# Altium PCB sw108-10.25.PcbDoc (part 1 of 2)
Units mm, origin at the board's own origin, x right, y up, seen from the top; angles counter-clockwise.
Board outline 60 x 92 mm, 2 copper layers (Top Layer, Bottom Layer); 64 components, 32 nets, 243 pads, 39 vias.
Unrouted connection lines stored in the file: 1.
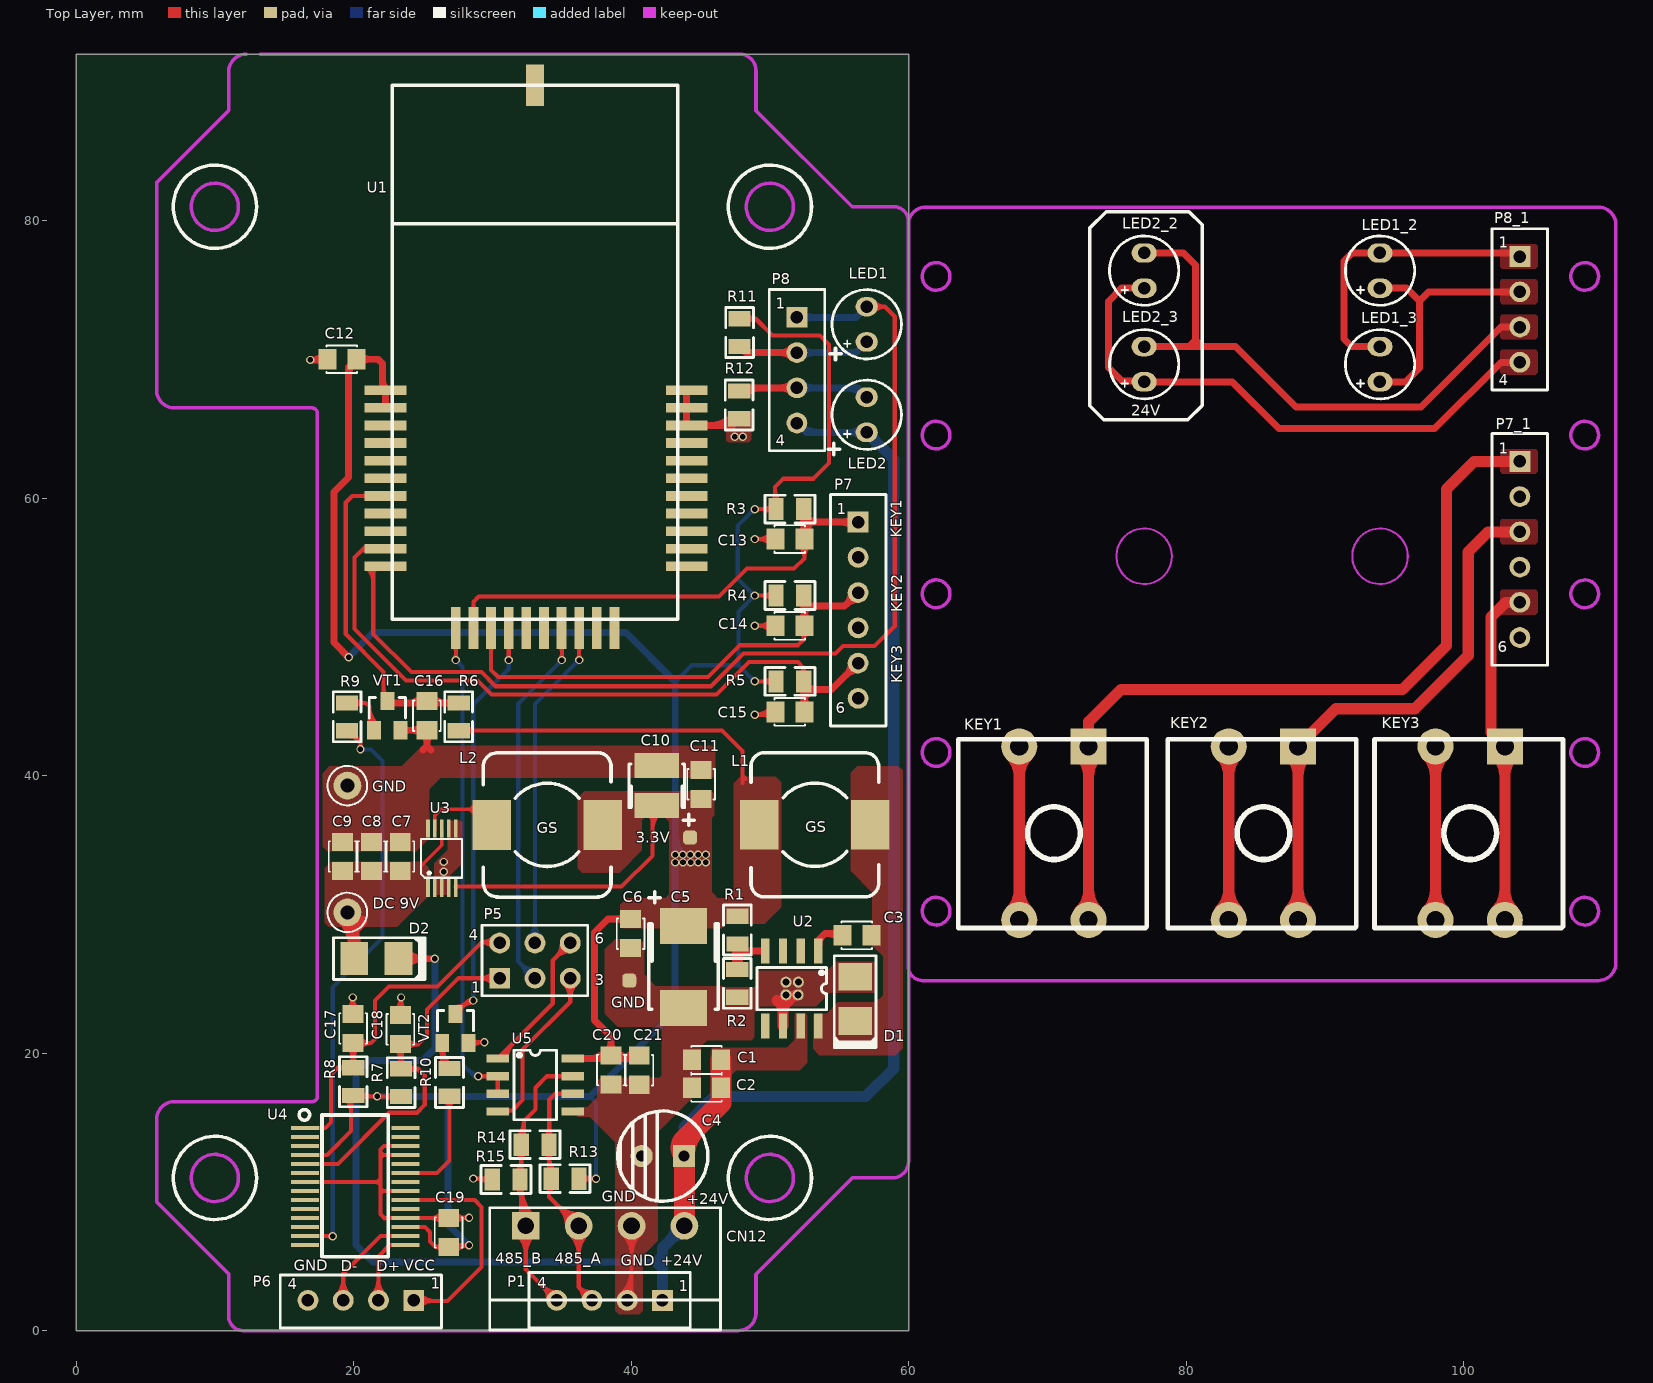
[diagram p0: Top Layer view]
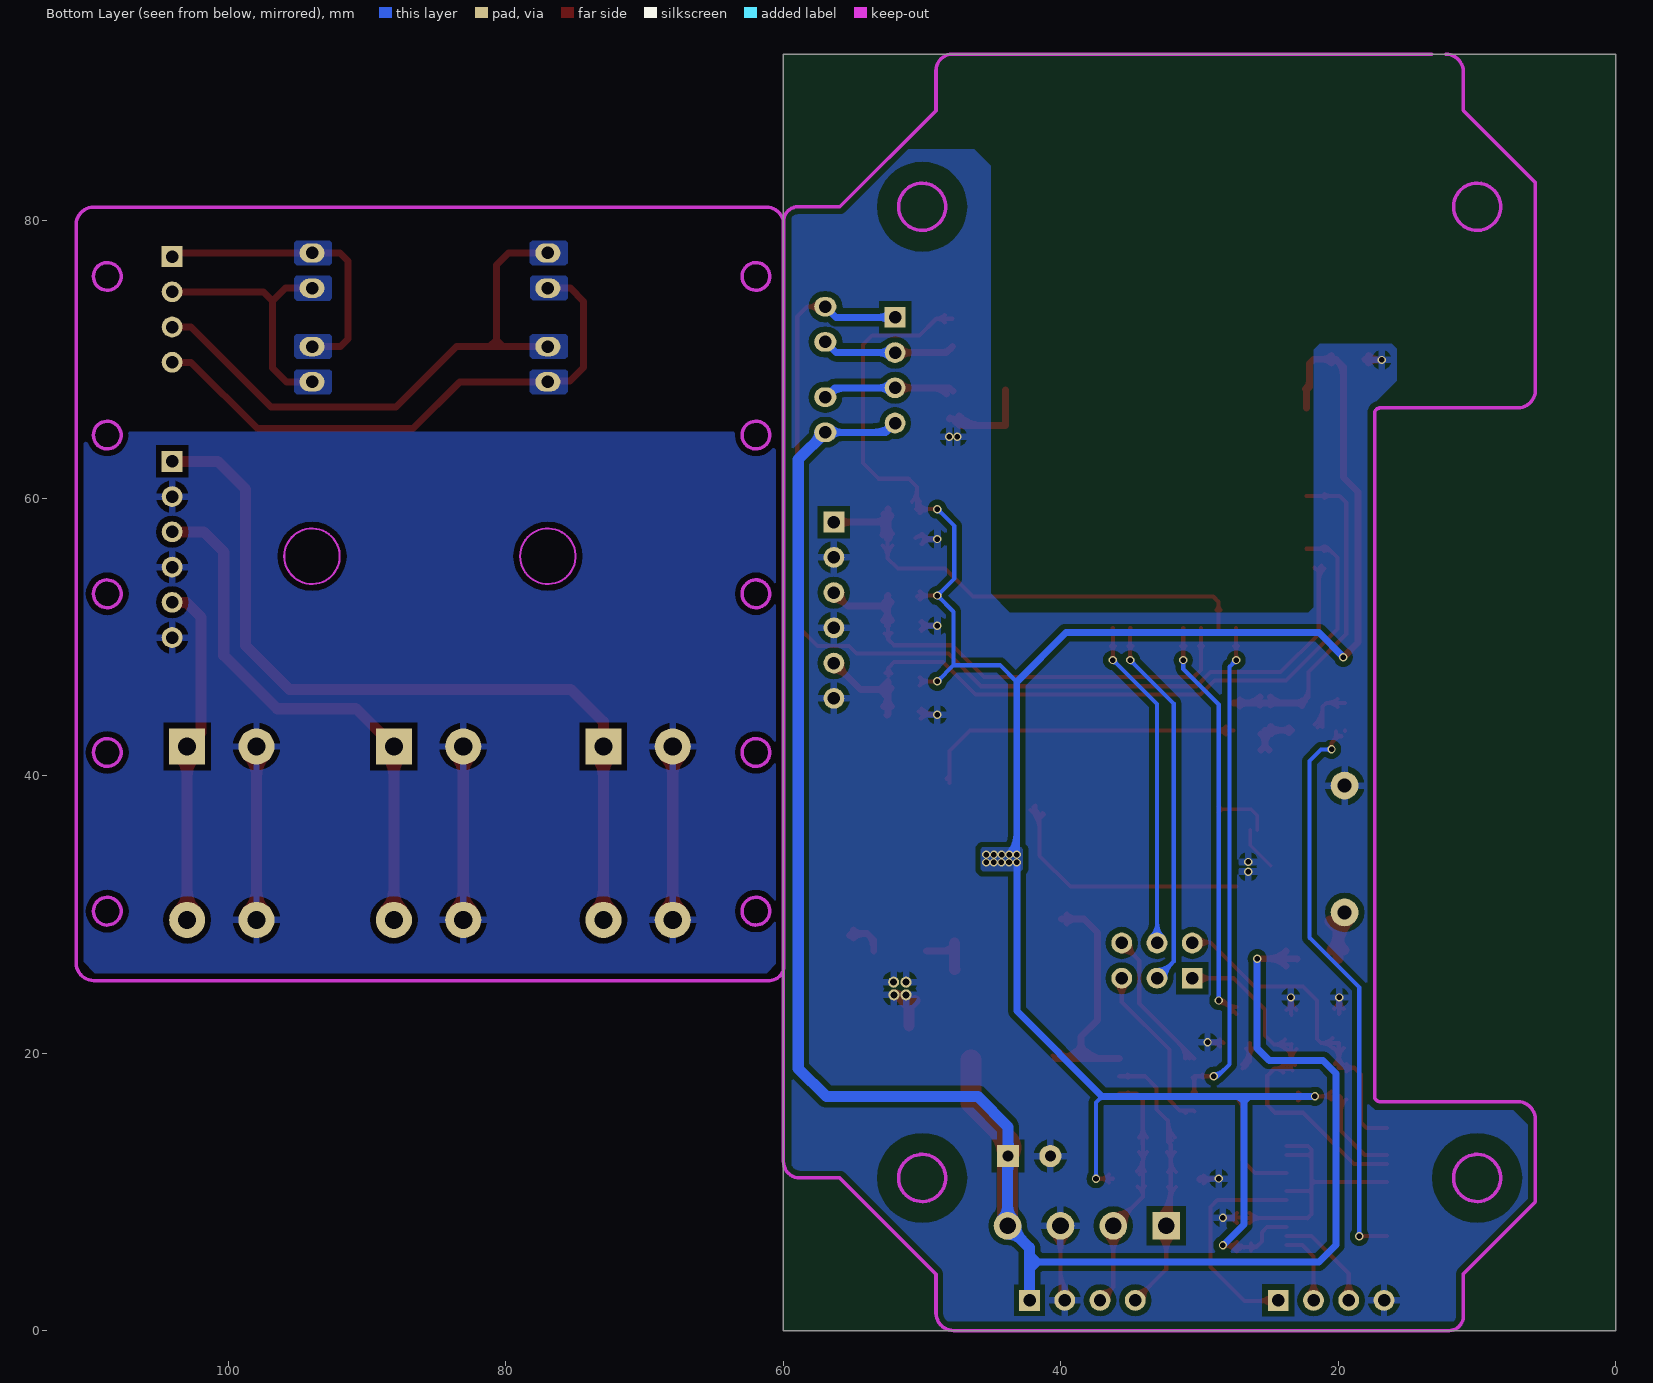
[diagram p1: Bottom Layer view, seen from below]

## Layer stack, top to bottom
Top Layer: signal copper 0.0356
Dielectric: dielectric 0.32, FR-4, Dk 4.8
Bottom Layer: signal copper 0.0356

## Board outline
0,0 60,0 60,92 0,92

## Design rules (kind name [scope] priority, off if disabled: settings)
Clearance [All] p1: gap=0.2
ComponentClearance [All] p1: gap=0.254 collisioncheckmode=3 verticalgap=0.254
PolygonConnect [All] p1: connectstyle=Direct reliefconductorwidth=0.5 reliefentries=4 polygonreliefangle="90 Angle"
RoutingVias [All] p1: holewidth=0.711 width=1.27 viastyle="Through Hole" minholewidth=0.711 minwidth=1.27 maxholewidth=0.711 maxwidth=1.27
SolderMaskExpansion [All] p1: expansion=0.102
TestPointUsage [All] p1: valid=0 allowmultiple=FALSE
Testpoint [All] p1: side=15 testpointundercomponent=TRUE minsize=1.016 maxsize=2.54 preferedsize=1.524 minholesize=0 maxholesize=1.016 preferedholesize=0.813 testpointgrid=0.025 style=1023 order=0123456789
Width [All] p1: maxlimit=2 minlimit=0.254 preferedwidth=0.254 toplayer_prefwidth=0.3 bottomlayer_prefwidth=0.3 minimp=50.000000 maximp=50.000000 favimp=50.000000
18 further rules are at their usual default settings.

## Classes and differential pairs
component class SW108_0713: C1 C2 C3 C4 C5 C6 C7 C8 C9 C10 C11 C12 C13 C14 C15 C16 C17 C18 C19 C20 C21 D1 D2 KEY1 KEY2 KEY3 L1 L2 LED1 LED2 P1 P5 P6 R1 R2 R3 R4 R5 R6 R7 R8 R9 R10 R11 R12 R13 R14 R15 U1 U2 U3 U4 U5 VT1 VT2

## Components (designator, comment, footprint, x,y, rotation, side; value= is the part's Value field where it differs from the comment)
C1 "4.7μF/10%/0805" C-0805 43.73,18.62 r0 top
C2 "4.7μF/10%/0805" C-0805 43.73,16.6 r0 top
C3 "0.01μF/10%/0805" C-0805 54.57,27.59 r0 top
C4 "220μF" CZ3.0/6.5 42.28,12.58 r0 top
C5 "476C" C-TAN-D 41.28,30.46 r270 top
C6 "0.1μf/10%/0805" C-0805 40.86,26.91 r90 top
C7 "4.7μF/10%/0805" C-0805 22.462,35.876 r270 top
C8 "4.7μF/10%/0805" C-0805 20.382,35.876 r270 top
C9 "4.7μF/10%/0805" C-0805 18.302,35.876 r270 top
C10 "47uF/20%/10V/B" C-TAN-B 43.85,36.94 r90 top
C11 "0.1μf/10%/0805" C-0805 44.14,41.07 r270 top
C12 "0.1uf/10%/0805" C-0805 17.45,69.11 r0 top
C13 "0.1uf/10%/0805" C-0805 49.74,56.15 r0 top
C14 "0.1uf/10%/0805" C-0805 49.74,49.9 r0 top
C15 "0.1uf/10%/0805" C-0805 49.74,43.69 r0 top
C16 "0.1uf/10%/0805" C-0805 26.18,42.62 r90 top
C17 "100pf/10%/0805" C-0805 19.06,23.48 r270 top
C18 "100pf/10%/0805" C-0805 22.47,23.41 r270 top
C19 "0.1μf/10%/0805" C-0805 25.95,8.77 r270 top
C20 "0.1uf/10%/0805" C-0805 39.45,17.09 r90 top
C21 "1uf/10%/0805" C-0805 41.49,17.07 r90 top
CN12 "模拟指令" MC1.5/4-G-3.81 32.41,7.55 r0 top locked
D1 "1N5408/SMA" "SMA 2+" 54.59,27.05 r270 top
D2 "1N5408/SMB" "SMA 2+" 18.5,25.26 r0 top
KEY1 "Header 2" TSQG-3 70.46,35.852 r90 top locked
KEY2 "Header 2" TSQG-3 85.56,35.852 r90 top locked
KEY3 "Header 2" TSQG-3 100.46,35.852 r90 top locked
L1 "15μH" GSDS104C2 53.24,36.46 r270 top
L2 "15μH" GSDS104C2 33.95,36.45 r90 top
LED1 "green LED" LED-φ3#1 56.98,72.53 r90 top
LED1_2 "green LED" LED-φ3#2 93.974,76.4 r90 top locked (schematic designator LED1)
LED1_3 "green LED" LED-φ3#2 93.974,69.65 r90 top locked (schematic designator LED1)
LED2 "VDD33" LED-φ3#1 56.98,66.01 r90 top
LED2_2 "VDD33" LED-φ3#2 76.974,76.4 r90 top locked (schematic designator LED2)
LED2_3 "VDD33" LED-φ3#2 76.974,69.65 r90 top locked (schematic designator LED2)
P1 "1*4/2.54排针" PIN-S-2.54-1*4 42.26,2.18 r180 top locked
P5 "2*3排针" HDR2X3_CEN 30.53,25.4 r0 top
P6 "1*4/2.54排针" PIN-S-2.54-1*4 24.33,2.18 r180 top locked
P7 "1*4/2.54排针" PIN-S-2.54-1*6 56.36,58.27 r270 top (schematic designator P6)
P7_1 "1*4/2.54排针" PIN-S-2.54-1*6 104.054,62.65 r270 top locked (schematic designator P6)
P8 "1*4/2.54排针" PIN-S-2.54-1*4 51.95,73.03 r270 top (schematic designator P6)
P8_1 "1*4/2.54排针" PIN-S-2.54-1*4 104.054,77.41 r270 top locked (schematic designator P6)
R1 "10K" R-0805 48.56,27.37 r90 top
R2 "7580M\3.24K" R-0805 46.75,26.53 r270 top
R3 "10K/5%/0805" R-0805 52.95,60.11 r180 top
R4 "10K/5%/0805" R-0805 52.95,53.88 r180 top
R5 "10K/5%/0805" R-0805 52.95,47.69 r180 top
R6 "10K/5%/0805" R-0805 26.67,45.74 r270 top
R7 "3.3K/5%/0805" R-0805 22.52,19.37 r270 top
R8 "3.3K/5%/0805" R-0805 19.07,19.44 r270 top
R9 "1K/5%/0805" R-0805 18.63,45.74 r270 top
R10 "1K/5%/0805" R-0805 26.01,19.39 r270 top
R11 "3.3K/5%/0805" R-0805 46.92,73.43 r270 top
R12 "1.5K/5%/0805" R-0805 48.69,65.22 r90 top
R13 "3.3K/5%/0805" R-0805 33.74,10.05 r0 top
R14 "120ohm" R-0805 31.58,12.5 r0 top
R15 "3.3K/5%/0805" R-0805 29.49,9.99 r0 top
U1 "STM32W_1" STM32W108-3 43.37,51.27 r90 top locked
U2 "TPS5430" SO-G8#1 51.57,24.65 r180 top
U3 "TPS62056" MSOP-10 25.352,32.006 r0 top
U4 "FT232R" SSOP-28 16.5,14.61 r0 top
U5 "MAX3485CSA" SO-G8#2 33.09,17.69 r270 top
VT1 "2N3904" SOT23-3 21.48,43.27 r0 top
VT2 "2N3904" SOT23-3 26.39,20.73 r0 top

## Footprints (in the part's own frame and the unit in brackets; to place one, negate y for a bottom-side part, rotate by r counter-clockwise, add the part's x,y. Pads: shape width x height; smd on the part's side, far side on the other; paste and mask are expansions set on the pad)
C-0805 [mm]
  rect 1.3x1.5 smd: 1(0.65,0.9) 2(2.75,0.9)
  silkscreen extent 0.6,-0.1 2.8,1.9
C-TAN-B [mm]
  rect 1.8x3.2 smd: 1(0.9,2) 2(3.8,2)
  silkscreen extent 0.75,0 3.9,4
C-TAN-D [mm]
  rect 2.6x3.4 smd: 1(1.3,2.5) 2(7.2,2.5)
  silkscreen extent 1.15,0 7.3,5
CZ3.0/6.5 [mm]
  rect 1.6x1.6 hole 0.8: 1(1.524,0)
  round 1.6 hole 0.8: 2(-1.524,0)
  silkscreen extent -3.25,-3.25 3.25,3.25
GSDS104C2 [mm]
  rect 3.6x2.8 smd: 1(0,4) 2(0,-4)
  silkscreen extent -5.2,-4.6 5.21,4.6
HDR2X3_CEN [mm] "Connector; Header; 3x2 Position"
  rect 1.5x1.5 hole 0.9: 1(0,0)
  round 1.5 hole 0.9: 2(2.54,0) 3(5.08,0) 4(0,2.54) 5(2.54,2.54) 6(5.08,2.54)
  silkscreen extent -1.27,-1.27 6.35,3.81
LED-φ3#1 [mm]
  oval 1.4x1.6 hole 0.9: 1(-1.27,0) 2(1.27,0)
  silkscreen extent -2.5,-2.5 2.5,2.5
LED-φ3#2 [mm]
  oval 1.4x1.8 hole 0.9: 1(-1.27,0) 2(1.27,0)
  silkscreen extent -2.5,-2.5 2.5,2.5
MC1.5/4-G-3.81 [mm]
  rect 2x2 hole 1.2: 1(0,0)
  round 2 hole 1.2: 2(3.81,0) 3(7.62,0) 4(11.43,0)
  silkscreen extent -2.6,-7.5 14.03,1.3
MSOP-10 [mm]
  rect 0.27x1.3 smd mask+0.05: 1(0,-0.1) 2(0.5,-0.1) 3(1,-0.1) 4(1.5,-0.1) 5(2,-0.1) 6(2,4.175) 7(1.5,4.175) 8(1,4.175) 9(0.5,4.175) 10(0,4.175)
  silkscreen extent -0.51,0.64 2.46,3.43
PIN-S-2.54-1*4 [mm]
  rect 1.5x1.5 hole 0.9: 1(0,0)
  round 1.5 hole 0.9: 2(2.54,0) 3(5.08,0) 4(7.62,0)
  silkscreen extent -2,-2 9.62,2
PIN-S-2.54-1*6 [mm]
  rect 1.5x1.5 hole 0.9: 1(0,0)
  round 1.5 hole 0.9: 2(2.54,0) 3(5.08,0) 4(7.62,0) 5(10.16,0) 6(12.7,0)
  silkscreen extent -2,-2 14.7,2
R-0805 [mm]
  rect 1.1x1.6 smd: 1(0.5,0.9) 2(2.5,0.9)
  silkscreen extent -0.3,-0.1 3.3,1.9
"SMA 2+" [mm]
  rect 2x2.4 smd: 1(1.538,1.554) 2(4.738,1.554)
  silkscreen extent 0.04,0.05 6.64,3.05
SO-G8#1 [mm]
  rect 0.6x1.8 smd: 1(-1.916,-2.7) 2(-0.646,-2.7) 3(0.624,-2.7) 4(1.894,-2.7) 5(1.894,2.7) 6(0.624,2.7) 7(-0.646,2.7) 8(-1.916,2.7)
  silkscreen extent -2.51,-1.52 2.49,1.52
SO-G8#2 [mm]
  rect 0.6x1.6 smd: 1(-1.916,-2.7) 2(-0.646,-2.7) 3(0.624,-2.7) 4(1.894,-2.7) 5(1.894,2.7) 6(0.624,2.7) 7(-0.646,2.7) 8(-1.916,2.7)
  silkscreen extent -2.51,-1.52 2.49,1.52
SOT23-3 [mm]
  rect 1x1.3 smd: 1(0,0) 2(1.9,0) 3(0.95,2.1)
  silkscreen extent -0.35,0.87 2.25,2.35
SSOP-28 [mm]
  rect 2x0.3 smd: 1(0,0) 2(0,-0.65) 3(0,-1.3) 4(0,-1.95) 5(0,-2.6) 6(0,-3.25) 7(0,-3.9) 8(0,-4.55) 9(0,-5.2) 10(0,-5.85) 11(0,-6.5) 12(0,-7.15) 13(0,-7.8) 14(0,-8.45) 15(7.239,-8.45) 16(7.239,-7.8) 17(7.239,-7.15) 18(7.239,-6.5) 19(7.239,-5.85) 20(7.239,-5.2) 21(7.239,-4.55) 22(7.239,-3.9) 23(7.239,-3.25) 24(7.239,-2.6) 25(7.239,-1.95) 26(7.239,-1.3) 27(7.239,-0.65) 28(7.239,0)
  silkscreen extent -0.43,-9.27 5.99,1.32
STM32W108-3 [mm]
  rect 0.7x3 smd: 1(16.51,21.074) 2(15.24,21.074) 3(13.97,21.074) 4(12.7,21.074) 5(11.43,21.074) 6(10.16,21.074) 7(8.89,21.074) 8(7.62,21.074) 9(6.35,21.074) 10(5.08,21.074) 11(3.81,21.074) 22(3.81,-0.627) 23(5.08,-0.627) 24(6.35,-0.627) 25(7.62,-0.627) 26(8.89,-0.627) 27(10.16,-0.627) 28(11.43,-0.627) 29(12.7,-0.627) 30(13.97,-0.627) 31(15.24,-0.627) 32(16.51,-0.627)
  rect 3x0.7 smd: 12(-0.627,16.002) 13(-0.627,14.732) 14(-0.627,13.462) 15(-0.627,12.192) 16(-0.627,10.922) 17(-0.627,9.652) 18(-0.627,8.382) 19(-0.627,7.112) 20(-0.627,5.842) 21(-0.627,4.572)
  rect 3x1.3 smd: ""(38.5,10.314)
  silkscreen extent 0,0 38.5,20.57
TSQG-3 [mm]
  rect 2.6x2.6 hole 1.3: 1(6.248,-2.515)
  round 2.6 hole 1.3: 2(6.248,2.485) 3(-6.252,-2.515) 4(-6.252,2.485)
  silkscreen extent -6.83,-6.71 6.76,6.88

## Part data
C1 C2 C3 C6 C7 C8 C9 C11 C12 C13 C14 C15 C16 C17 C18 C19 C20 C21: library part Cap, "Capacitor"
C4 C5: library part "Cap Pol1", "Polarized Capacitor (Radial)"
C10: library part ASC-0013BA
CN12: library part Header1*4
D1 D2: library part "Diode 1N5408", "3 Amp Medium Power Silicon Rectifier Diode"
KEY1 KEY2 KEY3: "Header, 2-Pin"
L1 L2: library part Inductor, "Inductor"
LED1 LED1_2 LED1_3: library part LED
LED2 LED2_2 LED2_3: library part LED3, "Typical BLUE SiC LED"
P1 P6 P7 P7_1 P8 P8_1: library part "Header 4", "Header, 4-Pin"
P5: library part "Header 3X2A", "Header, 3-Pin, Dual row"
R1 R2 R3 R4 R5 R6 R12: library part Res2, "Resistor"
R7 R8: library part RES_1
R9 R10 R11 R13 R14 R15: library part RES, "R"
U1: library part STM32W108-3
U5: library part MAX485CSA, "Low-Power, Slew-Rate-Limited RS-485/RS-422 Transceiver"
VT1 VT2: library part NPN, "NPN Transistor"

## Free pads (board coordinates)
  round 2 hole 1: 0(19.55,30.14) 1(19.55,39.28)
  round 0.8 hole 0.5: 0(51.16,25.11) 1(52.05,25.11) 2(51.16,24.2) 3(52.03,24.2)
  rrect50% 1x1 smd: 4(44.25,35.54) 5(39.87,25.23)

## Via types
v1: diameter 0.6, hole 0.4, Top Layer to Bottom Layer, 39 vias

## Nets (pads, with @x,y where several pads share a name; then routed paths per layer and width w, separated by ;. In a path a pad name is that pad's centre, name@x,y a point inside that pad or via, vN(x,y) a via of type N, cw(c..) or ccw(c..) an arc to the next point about the centre after c; other vN are vias at no path point)
485_A: CN12.2 P1.3 R13.1 R14.2 U5.6 | length 57.1
  Top Layer w0.3: U5.6@35.79,17.066 34.526,17.066 34.1,16.64 34.1,13.42 R14.2@34.08,13.4 34.08,9.65 CN12.2@36.36,7.37 ; CN12.2@36.22,7.55 36.22,3.14 ; P1.3@37.18,2.18 36.22,3.14 ; 34.08,12.184 cw(c35.046,12.184) 34.363,12.867 ccw(c35.046,12.184) 34.08,12.184 ; 34.08,12.184 ccw(c33.114,12.184) 33.797,12.867 cw(c33.114,12.184) 34.08,12.184 ; 34.928,17.066 cw(c34.928,16.704) 35.184,16.96 ccw(c34.928,16.704) 34.928,17.066 ; 34.928,17.066 ccw(c34.928,17.428) 35.184,17.172 cw(c34.928,17.428) 34.928,17.066 ; 36.22,3.14 cw(c35.346,2.266) 36.581,2.208 ccw(c35.346,2.266) 36.22,3.14 ; 36.22,3.14 ccw(c37.094,4.014) 37.152,2.779 cw(c37.094,4.014) 36.22,3.14 ; 36.22,5.498 cw(c38.272,5.498) 36.821,6.949 ccw(c38.272,5.498) 36.22,5.498 ; 36.22,5.498 ccw(c34.168,5.498) 35.619,6.949 cw(c34.168,5.498) 36.22,5.498 ; 36.22,6.222 cw(c37.548,6.222) 36.609,7.161 ccw(c37.548,6.222) 36.22,6.222 ; 36.22,6.222 ccw(c34.892,6.222) 35.831,7.161 cw(c34.892,6.222) 36.22,6.222 ; R14.2@33.797,13.933 ccw(c33.066,14.664) 34.1,14.664 cw(c33.066,14.664) R14.2@33.797,13.933 ; R13.1@33.957,10.417 cw(c33.661,10.121) 34.08,10.121 ccw(c33.661,10.121) R13.1@33.957,10.417 ; R13.1@33.957,11.483 ccw(c33.661,11.779) 34.08,11.779 cw(c33.661,11.779) R13.1@33.957,11.483 ; 34.08,9.638 cw(c34.967,9.638) 34.466,10.37 ccw(c34.967,9.638) 34.08,9.638 ; 34.08,11.828 ccw(c34.868,11.828) 34.311,11.271 cw(c34.868,11.828) 34.08,11.828 ; 34.08,12.552 ccw(c35.592,12.552) 34.523,11.483 cw(c35.592,12.552) 34.08,12.552 ; 34.1,14.567 ccw(c34.997,14.567) 34.363,13.933 cw(c34.997,14.567) 34.1,14.567 ; 34.701,9.029 ccw(c36.22,10.549) 36.22,8.4 cw(c36.22,10.549) 34.701,9.029 ; 34.797,8.933 cw(c33.414,7.55) 35.37,7.55 ccw(c33.414,7.55) 34.797,8.933 ; 35.213,8.517 ccw(c36.22,9.524) 36.22,8.1 cw(c36.22,9.524) 35.213,8.517 ; 35.309,8.421 cw(c34.439,7.55) 35.67,7.55 ccw(c34.439,7.55) 35.309,8.421
485_B: CN12.1 P1.4 R14.1 R15.2 U5.7 | length 62.3
  Top Layer w0.3: P1.4@34.64,2.18 32.41,4.41 CN12.1@32.41,7.55 32.08,7.88 R14.1@32.08,13.4 32.28,13.6 32.28,15.12 33.11,15.95 33.11,17.5 33.946,18.336 U5.7@35.79,18.336 ; 32.08,12.184 cw(c33.046,12.184) 32.363,12.867 ccw(c33.046,12.184) 32.08,12.184 ; 32.08,12.184 ccw(c31.114,12.184) 31.797,12.867 cw(c31.114,12.184) 32.08,12.184 ; 32.41,5.498 cw(c34.462,5.498) 33.011,6.949 ccw(c34.462,5.498) 32.41,5.498 ; 32.41,5.498 ccw(c30.358,5.498) 31.809,6.949 cw(c30.358,5.498) 32.41,5.498 ; 32.41,6.222 cw(c33.738,6.222) 32.799,7.161 ccw(c33.738,6.222) 32.41,6.222 ; 32.41,6.222 ccw(c31.082,6.222) 32.021,7.161 cw(c31.082,6.222) 32.41,6.222 ; 33.616,3.204 cw(c32.591,2.18) 34.04,2.18 ccw(c32.591,2.18) 33.616,3.204 ; 33.616,3.204 ccw(c34.64,4.229) 34.64,2.78 cw(c34.64,4.229) 33.616,3.204 ; 34.928,18.336 cw(c34.928,17.974) 35.184,18.23 ccw(c34.928,17.974) 34.928,18.336 ; 34.928,18.336 ccw(c34.928,18.698) 35.184,18.442 cw(c34.928,18.698) 34.928,18.336 ; R15.2@31.707,10.357 cw(c30.807,9.457) 32.08,9.457 ccw(c30.807,9.457) R15.2@31.707,10.357 ; R15.2@31.707,11.423 ccw(c30.807,12.323) 32.08,12.323 cw(c30.807,12.323) R15.2@31.707,11.423 ; R14.1@31.797,13.933 ccw(c30.631,15.099) 32.28,15.099 cw(c30.631,15.099) R14.1@31.797,13.933 ; CN12.1@31.809,8.151 ccw(c31.155,8.805) 32.08,8.805 cw(c31.155,8.805) CN12.1@31.809,8.151 ; R14.1@32.009,13.721 ccw(c31.356,14.374) 32.28,14.374 cw(c31.356,14.374) R14.1@32.009,13.721 ; 32.08,8.95 ccw(c33.81,8.95) 32.587,7.727 cw(c33.81,8.95) 32.08,8.95 ; 32.08,9.675 ccw(c34.535,9.675) 32.799,7.939 cw(c34.535,9.675) 32.08,9.675 ; 32.08,9.892 cw(c32.738,9.892) 32.273,10.357 ccw(c32.738,9.892) 32.08,9.892 ; R15.2@32.08,10.399 ccw(c35.259,10.399) 33.011,8.151 cw(c35.259,10.399) R15.2@32.08,10.399 ; 32.08,11.888 ccw(c32.738,11.888) 32.273,11.423 cw(c32.738,11.888) 32.08,11.888
/RESET: C16.2 R6.1 U1.7 VT1.3 | length 37.2
  Top Layer w0.3: U1.7@22.296,60.16 19.9,60.16 19.43,59.69 19.43,50.21 22.16,47.48 22.16,45.64 VT1.3@22.43,45.37 ; 20.663,60.16 cw(c20.663,59.677) 21.005,60.019 ccw(c20.663,59.677) 20.663,60.16 ; 20.663,60.16 ccw(c20.663,60.643) 21.005,60.301 cw(c20.663,60.643) 20.663,60.16 ; 22.16,46.292 ccw(c23.203,46.292) 22.465,45.555 cw(c23.203,46.292) 22.16,46.292
  Top Layer w0.5: VT1.3@22.43,45.37 22.56,45.24 R6.1@27.57,45.24 ; 26.596,45.24 cw(c26.596,44.516) 27.108,45.028 ccw(c26.596,44.516) 26.596,45.24 ; 26.596,45.24 ccw(c26.596,45.964) 27.108,45.452 cw(c26.596,45.964) 26.596,45.24 ; VT1.3@22.607,45.043 cw(c23.082,44.568) 23.082,45.24 ccw(c23.082,44.568) VT1.3@22.607,45.043 ; VT1.3@22.607,45.397 ccw(c22.985,45.775) 22.985,45.24 cw(c22.985,45.775) VT1.3@22.607,45.397 ; 23.901,45.24 ccw(c23.901,46.649) 24.897,45.653 cw(c23.901,46.649) 23.901,45.24 ; 24.528,45.24 cw(c24.528,44.718) 24.897,45.087 ccw(c24.528,44.718) 24.528,45.24 ; C16.2@25.663,45.087 cw(c26.032,44.718) 26.032,45.24 ccw(c26.032,44.718) C16.2@25.663,45.087 ; C16.2@25.663,45.653 ccw(c26.659,46.649) 26.659,45.24 cw(c26.659,46.649) C16.2@25.663,45.653
BOOT: U1.15 VT2.3 | length 39.5
  Top Layer w0.3: VT2.3@27.34,22.83 28.3,23.79 ; v1(28.61,23.79) 28.3,23.79 ; U1.15@31.178,50.643 31.18,50.641 v1(31.18,48.33) ; 28.3,23.79 cw(c28.3,23.545) 28.492,23.697 ccw(c28.3,23.545) 28.3,23.79 ; 28.3,23.79 ccw(c28.3,24.035) 28.492,23.883 cw(c28.3,24.035) 28.3,23.79 ; 31.18,48.692 cw(c30.818,48.692) 31.074,48.436 ccw(c30.818,48.692) 31.18,48.692 ; 31.18,48.692 ccw(c31.542,48.692) 31.286,48.436 cw(c31.542,48.692) 31.18,48.692 ; VT2.3@27.34,23.33 ccw(c27.34,24.537) 28.194,23.684 cw(c27.34,24.537) VT2.3@27.34,23.33 ; VT2.3@27.69,22.98 cw(c28.173,22.98) 27.831,23.321 ccw(c28.173,22.98) VT2.3@27.69,22.98 ; VT2.3@27.825,23.315 cw(c28.61,22.529) 28.61,23.64 ccw(c28.61,22.529) VT2.3@27.825,23.315 ; 28.145,23.635 cw(c28.354,23.426) 28.524,23.667 ccw(c28.354,23.426) 28.145,23.635 ; U1.15@31.037,49.352 cw(c30.69,49.005) 31.18,49.005 ccw(c30.69,49.005) U1.15@31.037,49.352 ; 31.18,49.015 cw(c31.656,49.015) 31.319,49.352 ccw(c31.656,49.015) 31.18,49.015
  Bottom Layer w0.3: v1(28.61,23.79) 28.62,23.8 28.62,45.13 31.18,47.69 v1(31.18,48.33) ; 31.18,47.968 cw(c31.542,47.968) 31.286,48.224 ccw(c31.542,47.968) 31.18,47.968 ; 31.18,47.968 ccw(c30.818,47.968) 31.074,48.224 cw(c30.818,47.968) 31.18,47.968
CBUS0: R10.2 U4.23 | length 11.2
  Top Layer w0.3: U4.23@23.739,11.36 26.01,11.36 26.91,12.26 R10.2@26.91,16.89 ; 26.91,15.924 cw(c27.876,15.924) 27.193,16.607 ccw(c27.876,15.924) 26.91,15.924 ; 26.91,15.924 ccw(c25.944,15.924) 26.627,16.607 cw(c25.944,15.924) 26.91,15.924
CBUS2: R9.2 U4.13 | length 47.9
  Top Layer w0.3: U4.13@16.5,6.81 18.48,6.81 v1(18.49,6.8) ; R9.2@19.51,43.22 R9.2@19.53,43.24 ; R9.2@19.96,42.89 20.49,42.36 v1(20.49,41.89) ; 20.49,42.252 cw(c20.128,42.252) 20.384,41.996 ccw(c20.128,42.252) 20.49,42.252 ; 20.49,42.252 ccw(c20.852,42.252) 20.596,41.996 cw(c20.852,42.252) 20.49,42.252 ; 18.104,6.81 cw(c18.104,6.414) 18.384,6.694 ccw(c18.104,6.414) 18.104,6.81 ; 18.152,6.81 ccw(c18.152,7.138) 18.384,6.906 cw(c18.152,7.138) 18.152,6.81 ; R9.2@19.78,42.84 cw(c19.78,42.285) 20.173,42.677 ccw(c19.78,42.285) R9.2@19.78,42.84 ; R9.2@20.174,43.172 ccw(c20.991,43.031) 20.405,42.445 cw(c20.991,43.031) R9.2@20.174,43.172
  Bottom Layer w0.3: v1(18.49,6.8) 18.49,24.73 22.08,28.32 22.08,41.05 21.24,41.89 v1(20.49,41.89) ; 18.49,7.162 cw(c18.128,7.162) 18.384,6.906 ccw(c18.128,7.162) 18.49,7.162 ; 18.49,7.162 ccw(c18.852,7.162) 18.596,6.906 cw(c18.852,7.162) 18.49,7.162 ; 20.852,41.89 cw(c20.852,42.252) 20.596,41.996 ccw(c20.852,42.252) 20.852,41.89 ; 20.852,41.89 ccw(c20.852,41.528) 20.596,41.784 cw(c20.852,41.528) 20.852,41.89
D+: P6.2 U4.15 | length 10
  Top Layer w0.3: P6.2@21.79,2.18 21.79,5.35 22.6,6.16 U4.15@23.739,6.16 ; 21.79,3.629 cw(c20.341,3.629) 21.366,2.604 ccw(c20.341,3.629) 21.79,3.629 ; 21.79,3.629 ccw(c23.239,3.629) 22.214,2.604 cw(c23.239,3.629) 21.79,3.629
D-: P6.3 U4.16 | length 12.1
  Top Layer w0.3: P6.3@19.25,2.18 19.25,4.11 21.95,6.81 U4.16@23.739,6.81 ; 19.25,3.629 cw(c17.801,3.629) 18.826,2.604 ccw(c17.801,3.629) 19.25,3.629 ; 19.25,3.629 ccw(c20.699,3.629) 19.674,2.604 cw(c20.699,3.629) 19.25,3.629
GND: C1.1 C2.1 C4.2 C5.2 C6.1 C7.1 C8.1 C9.1 C10.2 C11.1 C12.1 C13.1 C14.1 C15.1 C16.1 C17.1 C18.1 C19.1 C20.1 C21.1 CN12.3 D1.1 KEY1.2 KEY1.4 KEY2.2 KEY2.4 KEY3.2 KEY3.4 P1.2 P6.4 P7.2 P7.4 P7.6 P7_1.2 P7_1.4 P7_1.6 pad.0@51.16,25.11 pad.1 pad.2 pad.3 pad.5 R2.2 R12.1 R15.1 U1.30 U1.31 U1.32 U2.6 U3.2 U3.3 U3.4 U3.6 U3.7 U3.10 U4.7 U4.18 U4.21 U4.25 U4.26 U5.5 VT1.2 VT2.2 | length 215.1
  Top Layer w0.3: U4.7@16.5,10.71 21.7,10.71 ; v1(19.94,24.01) 19.94,22.85 C17.1@19.96,22.83 ; 21.93,9.87 22.12,10.06 ; 21.93,10.25 22.12,10.06 ; 21.93,10.48 21.7,10.71 ; 21.93,10.94 21.7,10.71 ; 21.93,12.75 22.02,12.66 ; 21.97,12.49 22.14,12.66 ; 21.97,12.83 22.14,12.66 ; C18.1@23.37,22.76 23.42,22.81 v1(23.42,24.01) ; U4.21@23.739,10.06 22.12,10.06 ; U4.25@23.739,12.66 22.14,12.66 ; U4.26@23.739,13.31 22.18,13.31 21.93,13.06 21.93,8.39 22.22,8.1 22.23,8.11 C19.1@26.85,8.11 ; C19.1@26.85,8.12 26.87,8.14 v1(28.32,8.14) ; VT2.2@28.29,20.73 28.35,20.79 v1(29.43,20.79) ; v1(28.61,10.96) R15.1@29.92,10.96 ; CN12.3@40.03,7.55 40.03,2.49 P1.2@39.72,2.18 ; v1(48.9,44.38) C15.1@49.85,44.38 ; v1(48.9,50.8) C14.1@49.85,50.8 ; v1(48.9,57.05) 49.64,57.05 ; C13.1@49.99,56.7 49.64,57.05 ; C13.1@49.99,57.4 49.64,57.05 ; C15.1@50.12,44.11 C15.1@49.85,44.38 ; C15.1@50.12,44.65 C15.1@49.85,44.38 ; C14.1@50.12,50.53 C14.1@49.85,50.8 ; C14.1@50.12,51.07 C14.1@49.85,50.8 ; 19.94,23.648 cw(c20.302,23.648) 20.046,23.904 ccw(c20.302,23.648) 19.94,23.648 ; 19.94,23.648 ccw(c19.578,23.648) 19.834,23.904 cw(c19.578,23.648) 19.94,23.648 ; 23.42,23.648 cw(c23.782,23.648) 23.526,23.904 ccw(c23.782,23.648) 23.42,23.648 ; 23.42,23.648 ccw(c23.058,23.648) 23.314,23.904 cw(c23.058,23.648) 23.42,23.648 ; 27.958,8.14 cw(c27.958,7.778) 28.214,8.034 ccw(c27.958,7.778) 27.958,8.14 ; 27.958,8.14 ccw(c27.958,8.502) 28.214,8.246 cw(c27.958,8.502) 27.958,8.14 ; 28.972,10.96 cw(c28.972,11.322) 28.716,11.066 ccw(c28.972,11.322) 28.972,10.96 ; 28.972,10.96 ccw(c28.972,10.598) 28.716,10.854 cw(c28.972,10.598) 28.972,10.96 ; 29.068,20.79 cw(c29.068,20.428) 29.324,20.684 ccw(c29.068,20.428) 29.068,20.79 ; 29.068,20.79 ccw(c29.068,21.152) 29.324,20.896 cw(c29.068,21.152) 29.068,20.79 ; P1.2@39.72,2.18 ccw(c38.972,2.928) 40.03,2.928 cw(c38.972,2.928) P1.2@39.72,2.18 ; 40.03,5.498 cw(c42.082,5.498) 40.631,6.949 ccw(c42.082,5.498) 40.03,5.498 ; 40.03,5.498 ccw(c37.978,5.498) 39.429,6.949 cw(c37.978,5.498) 40.03,5.498 ; 40.03,6.222 cw(c41.358,6.222) 40.419,7.161 ccw(c41.358,6.222) 40.03,6.222 ; 40.03,6.222 ccw(c38.702,6.222) 39.641,7.161 cw(c38.702,6.222) 40.03,6.222 ; v1@49.183,50.8 cw(c49.183,49.593) 50.036,50.446 ccw(c49.183,49.593) v1@49.183,50.8 ; v1@49.183,50.8 ccw(c49.183,52.007) 50.036,51.154 cw(c49.183,52.007) v1@49.183,50.8 ; v1@49.183,57.05 cw(c49.183,55.843) 50.036,56.696 ccw(c49.183,55.843) v1@49.183,57.05 ; v1@49.183,57.05 ccw(c49.183,58.257) 50.036,57.404 cw(c49.183,58.257) v1@49.183,57.05 ; 49.262,44.38 cw(c49.262,44.742) 49.006,44.486 ccw(c49.262,44.742) 49.262,44.38 ; 49.262,44.38 ccw(c49.262,44.018) 49.006,44.274 cw(c49.262,44.018) 49.262,44.38 ; 49.262,50.8 cw(c49.262,51.162) 49.006,50.906 ccw(c49.262,51.162) 49.262,50.8 ; 49.262,50.8 ccw(c49.262,50.438) 49.006,50.694 cw(c49.262,50.438) 49.262,50.8 ; 49.262,57.05 cw(c49.262,57.412) 49.006,57.156 ccw(c49.262,57.412) 49.262,57.05 ; 49.262,57.05 ccw(c49.262,56.688) 49.006,56.944 cw(c49.262,56.688) 49.262,57.05 ; 49.64,57.05 cw(c49.64,56.738) 49.928,56.858 ccw(c49.64,56.738) 49.64,57.05 ; 49.64,57.05 ccw(c49.64,57.362) 49.928,57.242 cw(c49.64,57.362) 49.64,57.05 ; C17.1@19.606,23.184 ccw(c18.801,23.989) 19.94,23.989 cw(c18.801,23.989) C17.1@19.606,23.184 ; v1(19.94,24.01) ccw(c21.039,24.01) 20.297,23.199 cw(c21.039,24.01) v1(19.94,24.01) ; C18.1@23.032,23.129 ccw(c22.225,24.01) v1(23.42,24.01) cw(c22.225,24.01) C18.1@23.032,23.129 ; v1@23.42,23.846 ccw(c24.456,23.846) 23.724,23.114 cw(c24.456,23.846) v1@23.42,23.846 ; 25.519,8.11 ccw(c25.519,9.351) 26.396,8.474 cw(c25.519,9.351) 25.519,8.11 ; 25.567,8.11 cw(c25.567,6.937) 26.396,7.766 ccw(c25.567,6.937) 25.567,8.11 ; C19.1@27.304,7.766 cw(c28.205,6.865) 28.205,8.14 ccw(c28.205,6.865) C19.1@27.304,7.766 ; C19.1@27.304,8.474 ccw(c28.109,9.279) 28.109,8.14 cw(c28.109,9.279) C19.1@27.304,8.474 ; VT2.2@28.537,20.483 cw(c29.28,19.74) 29.28,20.79 ccw(c29.28,19.74) VT2.2@28.537,20.483 ; VT2.2@28.537,20.977 ccw(c28.99,21.43) 28.99,20.79 cw(c28.99,21.43) VT2.2@28.537,20.977 ; v1@28.855,10.96 cw(c28.855,9.755) 29.707,10.607 ccw(c28.855,9.755) v1@28.855,10.96 ; 29.193,10.96 ccw(c29.193,11.687) 29.707,11.173 cw(c29.193,11.687) 29.193,10.96 ; P1.2@39.296,2.604 ccw(c37.523,4.377) 40.03,4.377 cw(c37.523,4.377) P1.2@39.296,2.604 ; P1.2@39.508,2.392 ccw(c38.247,3.653) 40.03,3.653 cw(c38.247,3.653) P1.2@39.508,2.392 ; 40.03,2.88 ccw(c40.42,2.88) 40.144,2.604 cw(c40.42,2.88) 40.03,2.88 ; v1@48.917,44.38 ccw(c48.917,45.963) 50.036,44.844 cw(c48.917,45.963) v1@48.917,44.38 ; 49.448,44.38 cw(c49.448,43.548) 50.036,44.136 ccw(c49.448,43.548) 49.448,44.38 ; 49.642,44.38 ccw(c49.642,45.238) 50.249,44.631 cw(c49.642,45.238) 49.642,44.38 ; 49.702,57.112 cw(c50.086,56.728) 50.459,57.123 ccw(c50.086,56.728) 49.702,57.112
  Top Layer w0.5: v1(16.88,69.96) 18.05,69.96 C12.1@18.1,70.01 ; VT1.2@23.38,43.27 C16.1@25.28,43.27 25.28,42.14 ; 24.99,41.85 25.28,42.14 ; 25.57,41.85 25.28,42.14 ; R15.1@29.92,10.96 R15.1@29.99,10.89 ; U1.32@43.997,67.78 U1.30@43.997,65.24 47.31,65.24 R12.1@47.79,65.72 ; R12.1@47.47,65.63 R12.1@47.48,65.62 ; R12.1@47.99,65.76 R12.1@48.04,65.71 ; 23.984,43.27 cw(c23.984,43.873) 23.557,43.447 ccw(c23.984,43.873) 23.984,43.27 ; 23.984,43.27 ccw(c23.984,42.666) 23.557,43.093 cw(c23.984,42.666) 23.984,43.27 ; 24.214,43.27 cw(c24.214,42.304) 24.897,42.987 ccw(c24.214,42.304) 24.214,43.27 ; 24.214,43.27 ccw(c24.214,44.236) 24.897,43.553 cw(c24.214,44.236) 24.214,43.27 ; 25.28,42.304 cw(c26.246,42.304) 25.563,42.987 ccw(c26.246,42.304) 25.28,42.304 ; 25.28,42.304 ccw(c24.314,42.304) 24.997,42.987 cw(c24.314,42.304) 25.28,42.304 ; v1@17.014,69.96 ccw(c17.014,71.096) 17.817,70.293 cw(c17.014,71.096) v1@17.014,69.96 ; 17.255,69.96 cw(c17.255,69.165) 17.817,69.727 ccw(c17.255,69.165) 17.255,69.96 ; 45.657,65.24 ccw(c45.657,67.603) 47.328,65.932 cw(c45.657,67.603) 45.657,65.24 ; 46.864,65.24 ccw(c46.864,66.396) 47.681,65.579 cw(c46.864,66.396) 46.864,65.24
  Top Layer w0.8: 50.51,23.78 50.946,23.344 ; U2.6@50.946,21.95 50.946,23.344 ; 51.383,23.78 50.946,23.344 ; KEY1.4@67.974,29.6 KEY1.2@67.974,42.1 ; KEY2.4@83.074,29.66 KEY2.2@83.074,42.16 ; KEY3.4@97.974,29.6 KEY3.2@97.974,42.1 ; 51.642,24.039 cw(c52.03,23.651) pad.3@52.03,24.2 ; 51.642,24.039 cw(c52.03,23.651) pad.3@52.03,24.2 ; 51.642,24.039 cw(c52.03,23.651) pad.3@52.03,24.2 ; 51.642,24.039 cw(c52.03,23.651) pad.3@52.03,24.2 ; 67.974,31.773 ccw(c70.147,31.773) 68.611,30.236 cw(c70.147,31.773) 67.974,31.773 ; 67.974,31.773 cw(c65.802,31.773) 67.338,30.236 ccw(c65.802,31.773) 67.974,31.773 ; 67.974,39.927 ccw(c65.802,39.927) 67.338,41.464 cw(c65.802,39.927) 67.974,39.927 ; 67.974,39.927 cw(c70.147,39.927) 68.611,41.464 ccw(c70.147,39.927) 67.974,39.927 ; 83.074,31.833 ccw(c85.247,31.833) 83.711,30.296 cw(c85.247,31.833) 83.074,31.833 ; 83.074,31.833 cw(c80.902,31.833) 82.438,30.296 ccw(c80.902,31.833) 83.074,31.833 ; 83.074,39.987 ccw(c80.902,39.987) 82.438,41.524 cw(c80.902,39.987) 83.074,39.987 ; 83.074,39.987 cw(c85.247,39.987) 83.711,41.524 ccw(c85.247,39.987) 83.074,39.987 ; 97.974,31.773 ccw(c100.147,31.773) 98.611,30.236 cw(c100.147,31.773) 97.974,31.773 ; 97.974,31.773 cw(c95.802,31.773) 97.338,30.236 ccw(c95.802,31.773) 97.974,31.773 ; 97.974,39.927 ccw(c95.802,39.927) 97.338,41.464 cw(c95.802,39.927) 97.974,39.927 ; 97.974,39.927 cw(c100.147,39.927) 98.611,41.464 ccw(c100.147,39.927) 97.974,39.927
  other v1: 26.49,33.07 26.49,33.78 47.48,64.42 48.04,64.42
KEY1: C13.2 KEY1.1 KEY1.3 P7.1 P7_1.1 R3.1 U1.13 | length 130.2
  Top Layer w0.3: U1.13@28.638,50.643 28.638,52.528 29.02,52.91 46.33,52.91 48.34,54.92 51.75,54.92 52.49,55.66 C13.2@52.49,57.05 ; 28.638,52.276 cw(c28.155,52.276) 28.497,51.934 ccw(c28.155,52.276) 28.638,52.276 ; 28.638,52.276 ccw(c29.121,52.276) 28.779,51.934 cw(c29.121,52.276) 28.638,52.276 ; 52.49,55.743 cw(c53.697,55.743) 52.844,56.596 ccw(c53.697,55.743) 52.49,55.743 ; 52.49,55.743 ccw(c51.283,55.743) 52.136,56.596 cw(c51.283,55.743) 52.49,55.743
  Top Layer w0.5: R3.1@52.45,59.21 52.45,57.09 C13.2@52.49,57.05 ; 52.66,57.97 52.96,58.27 ; R3.1@52.66,58.57 52.96,58.27 ; P7.1@56.36,58.27 52.96,58.27 ; 52.45,58.236 cw(c53.174,58.236) 52.662,58.748 ccw(c53.174,58.236) 52.45,58.236 ; 52.45,58.236 ccw(c51.726,58.236) 52.238,58.748 cw(c51.726,58.236) 52.45,58.236 ; 52.96,58.27 ccw(c53.501,57.729) 52.837,57.349 cw(c53.501,57.729) 52.96,58.27 ; 55.153,58.27 cw(c55.153,57.063) 56.006,57.916 ccw(c55.153,57.063) 55.153,58.27 ; 55.153,58.27 ccw(c55.153,59.477) 56.006,58.624 cw(c55.153,59.477) 55.153,58.27 ; C13.2@52.207,57.433 ccw(c51.621,58.019) 52.45,58.019 cw(c51.621,58.019) C13.2@52.207,57.433 ; R3.1@52.309,58.819 ccw(c53.633,60.143) 53.633,58.27 cw(c53.633,60.143) R3.1@52.309,58.819 ; C13.2@52.403,57.1 cw(c52.913,57.392) 52.498,57.808 ccw(c52.913,57.392) C13.2@52.403,57.1 ; 52.45,58.212 ccw(c53.552,58.212) 52.773,57.433 cw(c53.552,58.212) 52.45,58.212 ; R3.1@52.738,58.876 ccw(c53.239,58.729) 52.87,58.36 cw(c53.239,58.729) R3.1@52.738,58.876
  Top Layer w0.8: KEY1.3@72.974,29.6 72.974,43.88 75.304,46.21 95.584,46.21 98.754,49.38 98.754,60.65 100.754,62.65 P7_1.1@104.054,62.65 ; 72.974,31.773 ccw(c75.147,31.773) 73.611,30.236 cw(c75.147,31.773) 72.974,31.773 ; 72.974,31.773 cw(c70.802,31.773) 72.338,30.236 ccw(c70.802,31.773) 72.974,31.773 ; 72.974,39.927 ccw(c70.802,39.927) 72.338,41.464 cw(c70.802,39.927) 72.974,39.927 ; 72.974,39.927 cw(c75.147,39.927) 73.611,41.464 ccw(c75.147,39.927) 72.974,39.927
KEY2: C14.2 KEY2.1 KEY2.3 P7.3 P7_1.3 R4.1 U1.14 | length 102.1
  Top Layer w0.3: U1.14@29.908,50.643 29.908,47.612 30.42,47.1 45.55,47.1 47.85,49.4 52.02,49.4 52.45,49.83 ; C14.2@52.45,50.6 52.45,49.83 ; 29.908,49.01 cw(c30.391,49.01) 30.049,49.352 ccw(c30.391,49.01) 29.908,49.01 ; 29.908,49.01 ccw(c29.425,49.01) 29.767,49.352 cw(c29.425,49.01) 29.908,49.01 ; 52.45,49.829 cw(c52.922,49.829) 52.712,50.252 ccw(c52.922,49.829) 52.45,49.829 ; 52.45,49.829 ccw(c51.896,49.829) 52.208,50.287 cw(c51.896,49.829) 52.45,49.829
  Top Layer w0.5: R4.1@52.45,52.98 52.49,52.94 C14.2@52.49,50.8 ; 52.69,51.975 R4.1@52.93,52.215 ; R4.1@52.69,52.455 R4.1@52.93,52.215 ; P7.3@56.36,53.19 55.385,52.215 R4.1@52.93,52.215 ; 52.49,51.866 cw(c51.524,51.866) 52.207,51.183 ccw(c51.524,51.866) 52.49,51.866 ; 52.49,51.866 ccw(c53.456,51.866) 52.773,51.183 cw(c53.456,51.866) 52.49,51.866 ; 55.506,52.336 cw(c56.36,51.483) 56.36,52.69 ccw(c56.36,51.483) 55.506,52.336 ; 55.506,52.336 ccw(c54.653,53.19) 55.86,53.19 cw(c54.653,53.19) 55.506,52.336 ; R4.1@52.238,52.518 cw(c51.629,51.909) 52.49,51.909 ccw(c51.629,51.909) R4.1@52.238,52.518 ; R4.1@52.309,52.589 ccw(c53.21,53.49) 53.21,52.215 cw(c53.21,53.49) R4.1@52.309,52.589 ; 52.49,52.102 cw(c53.078,52.102) 52.662,52.518 ccw(c53.078,52.102) 52.49,52.102
  Top Layer w0.8: KEY2.3@88.074,29.66 KEY2.1@88.074,42.16 ; KEY2.1@88.074,42.1 90.794,44.82 96.494,44.82 100.334,48.66 100.334,56.13 101.774,57.57 P7_1.3@104.054,57.57 ; 88.074,31.833 ccw(c90.247,31.833) 88.711,30.296 cw(c90.247,31.833) 88.074,31.833 ; 88.074,31.833 cw(c85.902,31.833) 87.438,30.296 ccw(c85.902,31.833) 88.074,31.833 ; 88.074,39.987 ccw(c85.902,39.987) 87.438,41.524 cw(c85.902,39.987) 88.074,39.987 ; 88.074,39.987 cw(c90.247,39.987) 88.711,41.524 ccw(c90.247,39.987) 88.074,39.987
KEY3: C15.2 KEY3.1 KEY3.3 P7.5 P7_1.5 R5.1 U1.10 | length 104.9
  Top Layer w0.3: U1.10@22.296,56.35 20.7,56.35 ; R5.1@52.43,47.19 52.43,47.77 ; 20.7,56.35 cw(c20.7,55.953) 20.997,56.217 ccw(c20.7,55.953) 20.7,56.35 ; 20.7,56.35 ccw(c20.7,56.747) 20.997,56.483 cw(c20.7,56.747) 20.7,56.35 ; 20.7,56.35 20.07,55.72 20.07,50.57 23.78,46.86 28.93,46.86 29.95,45.84 46.16,45.84 48.5,48.18 52.02,48.18 52.43,47.77 ; 52.43,47.77 cw(c51.939,47.77) 52.221,47.368 ccw(c51.939,47.77) 52.43,47.77 ; 52.43,47.77 ccw(c52.874,47.77) 52.651,47.386 cw(c52.874,47.77) 52.43,47.77 ; 20.477,56.127 cw(c20.791,55.813) 21.036,56.183 ccw(c20.791,55.813) 20.477,56.127 ; 20.737,56.387 cw(c20.998,56.126) 21.201,56.433 ccw(c20.998,56.126) 20.737,56.387
  Top Layer w0.5: 52.45,45.61 53.04,46.2 ; C15.2@52.52,44.35 52.45,44.42 R5.1@52.45,46.79 53.04,46.2 ; P7.5@56.36,48.11 54.45,46.2 53.04,46.2 ; 52.45,45.816 cw(c53.174,45.816) 52.662,46.328 ccw(c53.174,45.816) 52.45,45.816 ; 52.45,45.816 ccw(c51.726,45.816) 52.238,46.328 cw(c51.726,45.816) 52.45,45.816 ; 55.506,47.256 cw(c56.36,46.403) 56.36,47.61 ccw(c56.36,46.403) 55.506,47.256 ; 55.506,47.256 ccw(c54.653,48.11) 55.86,48.11 cw(c54.653,48.11) 55.506,47.256 ; C15.2@52.207,44.973 ccw(c51.621,45.559) 52.45,45.559 cw(c51.621,45.559) C15.2@52.207,44.973 ; 52.45,45.752 ccw(c53.552,45.752) 52.773,44.973 cw(c53.552,45.752) 52.45,45.752
  Top Layer w0.8: KEY3.3@102.974,29.6 KEY3.1@102.974,42.1 101.974,43.1 101.974,51.44 103.024,52.49 P7_1.5@104.054,52.49 ; 102.974,31.773 ccw(c105.147,31.773) 103.611,30.236 cw(c105.147,31.773) 102.974,31.773 ; 102.974,31.773 cw(c100.802,31.773) 102.338,30.236 ccw(c100.802,31.773) 102.974,31.773 ; 102.974,39.927 ccw(c100.802,39.927) 102.338,41.464 cw(c100.802,39.927) 102.974,39.927 ; 102.974,39.927 cw(c105.147,39.927) 103.611,41.464 ccw(c105.147,39.927) 102.974,39.927
NetC3_1: C3.1 U2.1 | length 7
  Top Layer w0.5: U2.1@53.486,27.35 53.486,28.116 53.98,28.61 55.1,28.61 C3.1@55.22,28.49 ; U2.1@53.536,27.85 cw(c54.3,27.85) 53.76,28.39 ccw(c54.3,27.85) U2.1@53.536,27.85 ; 54.206,28.61 cw(c54.206,27.576) 54.937,28.307 ccw(c54.206,27.576) 54.206,28.61 ; 54.303,28.61 ccw(c54.303,29.507) 54.937,28.873 cw(c54.303,29.507) 54.303,28.61
NetC3_2: C3.2 D1.2 L1.1 U2.8
NetL2_1: L2.1 U3.9 | length 4.4
  Top Layer w0.27: U3.9@25.852,36.081 25.852,37.132 26.29,37.57 28.42,37.57
  Top Layer w0.3: L2.1@28.64,37.35 28.42,37.57 L2.1@28.64,37.79
NetLED1_1: LED1.1 LED1_2.1 LED1_3.1 P8.2 P8_1.2 R11.2 | length 35.8
  Top Layer w0.5: R11.2@47.82,70.93 48.26,70.49 P8.2@51.95,70.49 ; LED1_3.1@93.974,68.38 95.804,68.38 96.814,69.39 96.814,74.2 ; LED1_2.1@93.974,75.13 93.984,75.14 95.874,75.14 96.814,74.2 ; P8_1.2@104.054,74.87 97.484,74.87 96.814,74.2 ; 50.743,70.49 cw(c50.743,69.283) 51.596,70.136 ccw(c50.743,69.283) 50.743,70.49 ; 50.743,70.49 ccw(c50.743,71.697) 51.596,70.844 cw(c50.743,71.697) 50.743,70.49 ; R11.2@47.929,70.789 ccw(c48.649,71.509) 48.649,70.49 cw(c48.649,71.509) R11.2@47.929,70.789
  Bottom Layer w0.5: P8.2@51.95,70.49 56.21,70.49 LED1.1@56.98,71.26 ; P8.2@52.304,70.136 cw(c53.157,69.283) 53.157,70.49 cw(c53.157,71.697) P8.2@52.304,70.844